# EAGLE board 7セグメントカウンタ回路20260909版 (EAGLE 9.7.0)
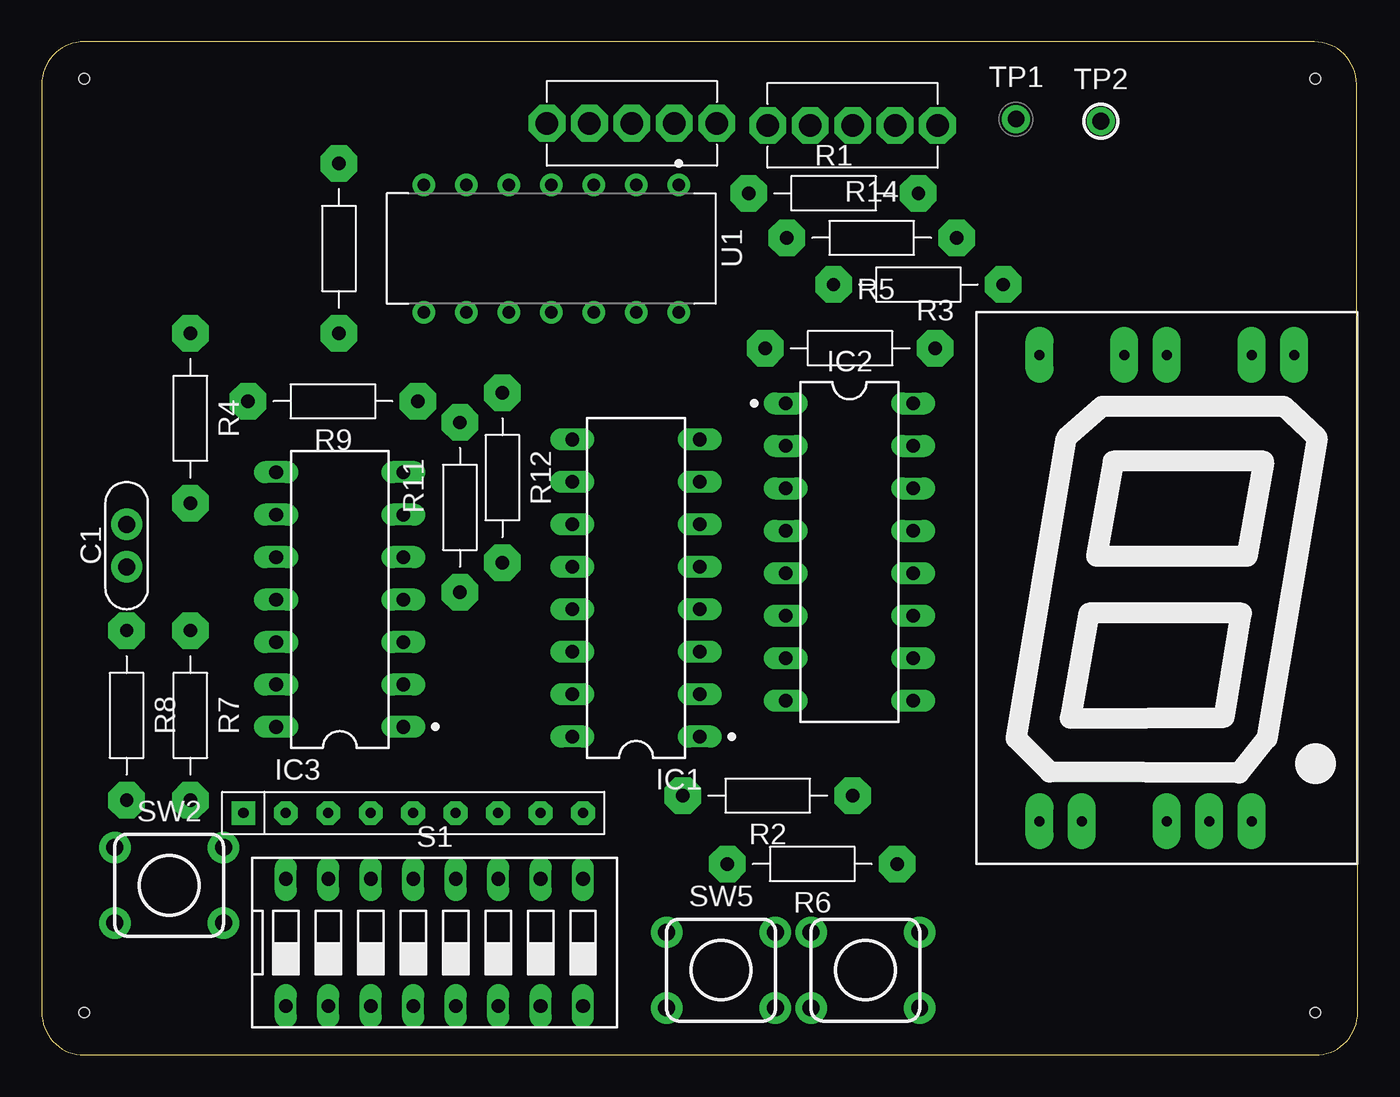
[diagram p0: board, top side]
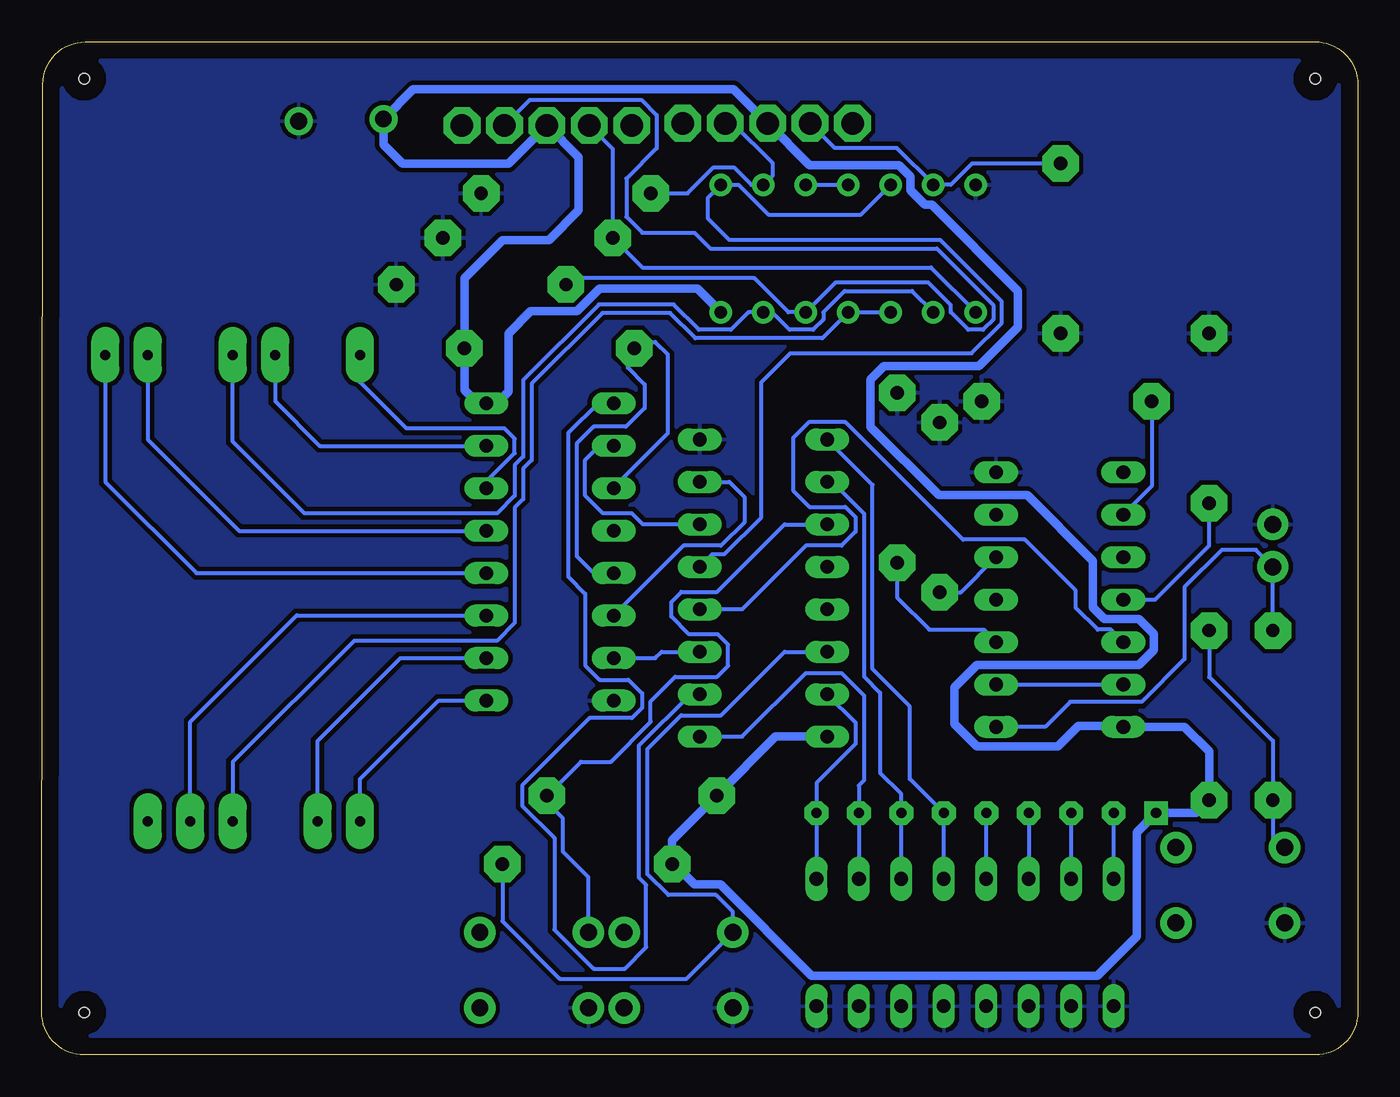
[diagram p1: board, bottom side, seen from below]

Size 78.74 x 60.63 mm. Coordinates in mm from the lower left corner, seen from the top.
Outline: 2.54,0 76.2,0 arc90 78.74,2.54 78.67,58.09 arc90 76.13,60.63 2.54,60.63 arc90 0,58.09 0,2.54 arc90 2.54,0
Copper layers (1*16): Top / Bottom
Stack-up Default Layer Stack: Top SilkScreen Epoxy Ink / Top SolderMask SR:Green 0.0254mm Dk 4.3 / Top Surface Finish Lead-Free 0.02mm / Top CuFoil:007 0.035mm / Dielectric-1 User Defined 1.5mm / Bottom CuFoil:007 0.035mm / Bottom Surface Finish Lead-Free 0.02mm / Bottom SolderMask SR:Green 0.0254mm Dk 4.3 / Bottom SilkScreen Epoxy Ink
Design rules: minimum copper width classes=1 20mil, minimum copper width 10mil, minimum drill size 0.6mm, copper clearance wire_polygon to wire_polygon 10mil, copper clearance wire_polygon to pad_smd 10mil, copper clearance wire_polygon to via 10mil, copper clearance pad_smd to pad_smd 10mil, copper clearance pad_smd to via 10mil, copper clearance via to via 10mil, copper clearance smd to pad (same net) 10mil, copper clearance smd to via (same net) 10mil, copper clearance smd to smd (same net) 10mil, dimension clearance 40mil, via restrict clearance 0mil, restrict clearance 0mil, drill distance 10mil, keepout clearance 0mil
Net classes: 1 power: width 0.508 mm
Holes 0.6 mm at 76.2,58.42 76.2,2.54 2.54,58.42 2.54,2.54

## Footprints (pad centres in the part's own frame; a part is rotated, then mirrored left to right if it is on the bottom)
CAP-THRU-2.54MM = drill 1.016 pad 1.88: 1 -1.27,0; 2 1.27,0
7SEG-NARG105 = drill 0.6 pad 1.676 long: 1 -7.62,-13.95; 2 -5.08,-13.95; 4 0,-13.95; 5 2.54,-13.95; 6 5.08,-13.95; 8 7.62,13.95; 9 5.08,13.95; 11 0,13.95; 12 -2.54,13.95; 14 -7.62,13.95
DIL16 = drill 0.813 long: 1 -3.81,8.89; 2 -3.81,6.35; 3 -3.81,3.81; 4 -3.81,1.27; 5 -3.81,-1.27; 6 -3.81,-3.81; 7 -3.81,-6.35; 8 -3.81,-8.89; 9 3.81,-8.89; 10 3.81,-6.35; 11 3.81,-3.81; 12 3.81,-1.27; 13 3.81,1.27; 14 3.81,3.81; 15 3.81,6.35; 16 3.81,8.89
DIL14 = drill 0.813 long: 1 -3.81,7.62; 2 -3.81,5.08; 3 -3.81,2.54; 4 -3.81,0; 5 -3.81,-2.54; 6 -3.81,-5.08; 7 -3.81,-7.62; 8 3.81,-7.62; 9 3.81,-5.08; 10 3.81,-2.54; 11 3.81,0; 12 3.81,2.54; 13 3.81,5.08; 14 3.81,7.62
AXIAL_PITCH400MIL = drill 0.8 pad 2.184 octagon: 1 -5.08,0; 2 5.08,0
RN8 = drill 0.6 pad 1.422 octagon: 1 0,-2.54; 2 0,-5.08; 3 0,-7.62; 4 0,-10.16; 5 0,-12.7; 6 0,-15.24; 7 0,-17.78; 8 0,-20.32 | drill 0.6 pad 1.422 square: COM 0,0
DS-08 = drill 0.813 long: 1 -8.89,-3.81; 2 -6.35,-3.81; 3 -3.81,-3.81; 4 -1.27,-3.81; 5 1.27,-3.81; 6 3.81,-3.81; 7 6.35,-3.81; 8 8.89,-3.81; 9 8.89,3.81; 10 6.35,3.81; 11 3.81,3.81; 12 1.27,3.81; 13 -1.27,3.81; 14 -3.81,3.81; 15 -6.35,3.81; 16 -8.89,3.81
TOGGLE_SWITCH = drill 1.34 pad 2.2 octagon: 1 -2.54,0; 2 0,0; 3 2.54,0; MTH1 -5.08,0; MTH2 5.08,0
SWITCH-MOMENTARY-PTH-6.5MM = drill 1.016 pad 1.88: 1 -3.251,2.261; 2 3.251,2.261; 3 -3.251,-2.261; 4 3.251,-2.261
TP-KEYSTONE-MINIATURE = drill 1 pad 1.676: TP 0,0
TP-KEYSTONE-COMPACT = drill 1 pad 1.676: TP 0,0
DIP762W53P254L1969H508Q14B = drill 0.743 pad 1.343: 1 -3.81,7.62; 2 -3.81,5.08; 3 -3.81,2.54; 4 -3.81,0; 5 -3.81,-2.54; 6 -3.81,-5.08; 7 -3.81,-7.62; 8 3.81,-7.62; 9 3.81,-5.08; 10 3.81,-2.54; 11 3.81,0; 12 3.81,2.54; 13 3.81,5.08; 14 3.81,7.62

## Placement (x,y rotation side)
C1  0.1u  [CAP-THRU-2.54MM]  5.08,30.48 90 top
DS1  7SEG-NARG105  [7SEG-NARG105]  67.31,27.94 0 top
IC1  74HC193TC74HC193AP(DIP)  [DIL16]  35.56,27.94 180 top
IC2  7447DIL16  [DIL16]  48.33,30.1 0 top
IC3  7414N  [DIL14]  17.83,27.25 180 top
R1  10K  [AXIAL_PITCH400MIL]  47.37,51.56 0 top
R2  10K  [AXIAL_PITCH400MIL]  43.43,15.52 180 top
R3  10k  [AXIAL_PITCH400MIL]  48.37,42.29 0 top
R4  10k  [AXIAL_PITCH400MIL]  8.89,38.1 270 top
R5  10K  [AXIAL_PITCH400MIL]  52.45,46.1 0 top
R6  10K  [AXIAL_PITCH400MIL]  46.1,11.43 180 top
R7  10K  [AXIAL_PITCH400MIL]  8.89,20.32 270 top
R8  10K  [AXIAL_PITCH400MIL]  5.08,20.32 270 top
R9  10k  [AXIAL_PITCH400MIL]  17.42,39.12 180 top
R10  10k  [AXIAL_PITCH400MIL]  17.78,48.26 90 top
R11  10k  [AXIAL_PITCH400MIL]  25.02,32.77 270 top
R12  10k  [AXIAL_PITCH400MIL]  27.56,34.54 270 top
R14  10k  [AXIAL_PITCH400MIL]  49.66,48.89 180 top
RN1  RN8RN8  [RN8]  12.07,14.48 90 top
S1  DS08  [DS-08]  23.5,6.73 0 top
SW1  TOGGLE_SWITCHES3P_TOGGLE_SWITCHES_DIP  [TOGGLE_SWITCH]  35.31,55.75 0 top
SW2  SWITCH_MOMENTARY  [SWITCH-MOMENTARY-PTH-6.5MM]  7.62,10.16 0 top
SW3  TOGGLE_SWITCHES3P_TOGGLE_SWITCHES_DIP  [TOGGLE_SWITCH]  48.51,55.63 0 top
SW4  SWITCH_MOMENTARY  [SWITCH-MOMENTARY-PTH-6.5MM]  49.28,5.08 0 top
SW5  SWITCH_MOMENTARY  [SWITCH-MOMENTARY-PTH-6.5MM]  40.64,5.08 0 top
TP1  TP_5000_MINIATURE  [TP-KEYSTONE-MINIATURE]  58.29,56.01 0 top
TP2  TP_5005_COMPACT  [TP-KEYSTONE-COMPACT]  63.37,55.88 0 top
U1  74HC02_PDIP  [DIP762W53P254L1969H508Q14B]  30.48,48.26 270 top

## Library data of the parts
C1 = Capacitor
DS1 = 7SEG-NARG105; CATEGORY: Opto-Electronic; SUB-CATEGORY: Display; TYPE: 7-Segment
IC1 = 74HC193
IC2 = 74series
IC3 = 74series; CATEGORY: Logic ICs; DESCRIPTION: Hex schmitt trigger Inverter 14-PDIP Through Hole; PACKAGE_SIZE: 14-PDIP; PACKAGE_TYPE: Through Hole; SUBCATEGORY: Gates and Inverters; TYPE: Inverter
R1-R12 R14 RN1 = resistor
S1 = DIP-SW; CATEGORY: Switches; DATASHEET: https://www.farnell.com/datasheets/2925626.pdf; DESCRIPTION: DIP Switch Slide Type 8Pos SPST-NO Raised Actuator Red TH; MANUFACTURER: Multicomp Pro; MPN: MCNDS-08V; OPERATING_TEMPERATURE: -40°C ~ 85°C; PACKAGE_SIZE: NA; PACKAGE_TYPE: Through Hole; PART_STATUS: Obsolete; ROHS: Compliant; SUBCATEGORY: DIP Switches; TYPE: SPST-NO
SW1 SW3 = Toggle_Switches
SW2 SW4 SW5 = Tact_switch
TP1 = TerminaiPoint; CATEGORY_L1: Test Points; CATEGORY_L2: PC Test Point; DATASHEET: https://www.keyelco.com/userAssets/file/K75p62.pdf; DESCRIPTION: Red PC Test Point, Miniature Phosphor Bronze Silver Plating Through Hole Mounting Type; MANUFACTURER: Keystone Electronics; MPN: 5000; PACKAGE: Through Hole; PART_STATUS: Active; ROHS: Compliant; SERIES: THM
TP2 = TerminaiPoint; CATEGORY_L1: Test Points; CATEGORY_L2: PC Test Point; DATASHEET: https://www.keyelco.com/userAssets/file/K75p62.pdf; DESCRIPTION: Red PC Test Point, Compact Phosphor Bronze Silver Plating Through Hole Mounting Type; MANUFACTURER: Keystone Electronics; MPN: 5005; PACKAGE: Through Hole; PART_STATUS: Active; ROHS: Compliant; SERIES: THM
U1 = IC_Logic; CATEGORY_L1: Logic ICs; CATEGORY_L2: Gates and Inverters; CATEGORY_L3: NOR Gate; DATASHEET: https://www.ti.com/lit/ds/symlink/cd74hc02.pdf; DESCRIPTION: Quadruple 2-Input NOR Gates 14-PDIP Through Hole; MANUFACTURER: Texas Instruments; MPN: CD74HC02E; OPERATING_TEMPERATURE: -55°C ~ 125°C; PACKAGE: Through Hole; PACKAGE_SIZE: 14-PDIP; PART_STATUS: Active; ROHS: Compliant; SERIES: 74HC

## Nets
193QA_TO_47INA: IC1.3 IC2.7
193QB_TO_47INB: IC1.2 IC2.1
193QC_TO_47INC: IC1.6 IC2.2
193QD_TO_47IND: IC1.7 IC2.6
+5.0V [power]: IC1.16 IC2.16 IC3.14 R2.2 R3.2 R6.2 R7.2 RN1.COM SW1.2 SW3.2 TP1.TP U1.14
COUNTER_STOP: R10.2 SW1.1 U1.6
GND [power]: C1.2 IC1.8 IC2.8 IC3.7 R1.2 R4.1 R5.2 R9.1 R10.1 R11.1 R12.1 R14.1 S1.1 S1.2 S1.3 S1.4 S1.5 S1.6 S1.7 S1.8 SW2.3 SW4.3 SW5.3 TP2.TP U1.7
IN_7SEG_4: DS1.11 U1.9 U1.13
IN_7SEG_11: DS1.4 U1.10 U1.11
IN_193_A: IC1.15 RN1.8 S1.9
IN_193_B: IC1.1 RN1.7 S1.10
IN_193_C: IC1.10 RN1.6 S1.11
IN_193_D: IC1.9 RN1.5 S1.12
IN_193_DOWN: IC1.4 IC3.12
IN_193_UP: IC1.5 U1.1 U1.5
N$1: IC3.3 R12.2
N$2: U1.3 U1.4
N$3: IC3.5 R11.2
N$4: IC3.2 IC3.13
N$5: IC3.9 R9.2
N$6: IC3.11 R4.2
N$9: RN1.4 S1.13
N$12: RN1.1 S1.16
N$14: RN1.3 S1.14
N$15: IC2.3 IC2.5 R3.1
N$21: RN1.2 S1.15
N$40: DS1.14 IC2.14
N$41: DS1.12 IC2.15
N$42: DS1.1 IC2.9
N$43: DS1.2 IC2.10
N$44: DS1.5 IC2.11
N$45: DS1.8 IC2.12
N$46: DS1.9 IC2.13
SIG_CLR: IC1.14 R6.1 SW5.1
SIG_DOWNCLK: C1.1 IC3.1 R8.1
SIG_DWCLK: R7.1 R8.2 SW2.1
SIG_GREEN: R5.1 SW3.3 U1.12
SIG_LOAD: IC1.11 R2.1 SW4.1
SIG_RED: R14.2 SW3.1 U1.8
SIG_UPCLK: R1.1 SW1.3 U1.2

## Tracks (layer width: path | path; a pad name or v marks a point on that pad's centre or on a via)
193QA_TO_47INA
  Bottom 0.254: IC2.7 42.04,23.75 41.66,24.13 IC1.3
193QB_TO_47INB
  Bottom 0.254: IC2.1 45.47,38.99 47.24,37.21 47.24,28.62 46.22,27.6 46.22,23.32 45.36,22.45 43.63,22.45 42.82,21.64 42.82,20.78 43.43,20.17 45.95,20.17 49.99,16.13 49.99,14.91 48.06,12.98 48.06,7.5 45.72,5.17 43.85,5.17 42.57,6.45 42.57,10.18 43,10.61 43,18.52 39.93,21.59 IC1.2
193QC_TO_47INC
  Bottom 0.254: IC2.2 45.38,36.45 46.22,35.61 46.22,33.48 45.15,32.41 43.43,32.41 42.77,31.75 IC1.6
193QD_TO_47IND
  Bottom 0.254: IC1.7 37.59,34.29 36.7,33.4 36.7,31.88 38.1,30.48 40.33,30.48 IC2.6
+5.0V
  Bottom 0.508: IC1.16 34.82,19.05 R2.2 41.02,12.85 R6.2 40.89,11.43 39.67,10.21 38.14,10.21 32.68,4.75 15.57,4.75 13.21,7.11 13.21,13.34 RN1.COM 9.65,14.48 R7.2 8.89,18.16 10.36,19.63 IC3.14 14.07,19.68 16.73,19.68 17.95,18.46 22.79,18.46 24.13,19.81 24.13,22 22.79,23.34 13.08,23.34 12.19,24.23 12.19,25.2 13.08,26.08 15.17,26.08 15.85,26.77 15.85,29.57 19.78,33.5 25.07,33.5 29.16,37.59 29.16,40.41 28.35,41.22 22.66,41.22 20.32,43.56 20.32,45.72 25.49,50.89 25.89,50.89 26.76,51.76 26.76,52.56 27.45,53.25 32.79,53.25 35.29,55.75 SW1.2 37.34,57.78 56.52,57.78 TP1.TP 58.29,54.48 57.15,53.34 50.8,53.34 SW3.2 46.61,53.72 46.61,50.55 48.39,48.77 51.18,48.77 53.45,46.5 R3.2 53.45,39.79 52.65,38.99 IC2.16 51.5,38.99 50.8,39.69 50.8,43.18 49.48,44.5 46.71,44.5 45.36,45.85 39.5,45.85 U1.14
COUNTER_STOP
  Bottom 0.254: SW1.1 31.29,54.27 27.58,54.27 25.4,52.1 U1.6 24.35,52.07 23.08,53.34 R10.2
GND
  pour Bottom: -1.27,62.23 80.01,62.23 80.01,-1.27 -1.27,-1.27
IN_7SEG_4
  Bottom 0.254: U1.9 26.67,45.72 30.7,45.72 31.97,44.45 31.97,44.01 32.58,43.4 34,43.4 35.05,44.45 U1.13 36.45,44.45 37.5,43.4 39.42,43.4 40.93,44.91 45.4,44.91 49.93,40.38 49.93,35.81 50.44,35.3 50.44,33.48 51.5,32.41 63.02,32.41 67.31,36.7 DS1.11
IN_7SEG_11
  Bottom 0.254: U1.10 U1.11 32.04,42.89 39.63,42.89 41.14,44.4 45.19,44.4 49.42,40.17 49.42,35.6 49.93,35.09 49.93,33.27 50.44,32.76 50.44,25.86 51.5,24.79 60.05,24.79 67.31,17.53 DS1.4
IN_193_A
  Bottom 0.254: S1.9 RN1.8 32.39,16.28 30.05,18.62 30.05,19.89 IC1.15
IN_193_B
  Bottom 0.254: S1.10 RN1.7 29.84,16.13 29.54,16.43 29.54,21.51 30.89,22.86 33.02,22.86 36.83,19.05 IC1.1
IN_193_C
  Bottom 0.254: S1.11 RN1.6 27.3,15.62 28.57,16.89 28.57,21.67 29.54,22.64 29.54,32.39 31.44,34.29 IC1.10
IN_193_D
  Bottom 0.254: S1.12 RN1.5 26.8,16.51 26.8,20.85 29.03,23.09 29.03,34.11 IC1.9
IN_193_DOWN
  Bottom 0.254: IC1.4 36.83,26.67 33.02,30.48 30.89,30.48 30.05,31.32 30.05,32.18 30.66,32.79 32.79,32.79 33.78,33.78 33.78,36.93 32.84,37.87 30.66,37.87 23.62,30.83 19.92,30.83 16.87,27.79 16.87,26.76 15.56,25.45 14.76,25.45 IC3.12
IN_193_UP
  Bottom 0.254: IC1.5 38.61,29.97 37.89,29.97 35.69,32.17 35.69,40.26 33.95,42 23.1,42 21.3,43.8 21.3,45.1 24.97,48.77 37.59,48.77 38.86,50.04 38.86,51.31 U1.1 37.05,52.07 35.27,50.29 29.72,50.29 U1.5
N$1
  Bottom 0.254: IC3.3 22.38,25.45 25.63,25.45 27.56,27.38 R12.2
N$2
  Bottom 0.254: U1.3 U1.4
N$3
  Bottom 0.254: R11.2 23.75,27.69 IC3.5
N$4
  Bottom 0.254: IC3.2 IC3.13
N$5
  Bottom 0.254: R9.2 12.32,39.09 12.32,34.03 IC3.9
N$6
  Bottom 0.254: R4.2 8.89,30.48 12.12,27.25 IC3.11
N$9
  Bottom 0.254: S1.13 RN1.4
N$12
  Bottom 0.254: S1.16 RN1.1
N$14
  Bottom 0.254: RN1.3 S1.14
N$15
  Bottom 0.254: IC2.3 44.52,33.97 41.28,37.21 41.28,41.91 42.04,42.67 42.91,42.67 R3.1 43.67,41.91 43.67,41.13 42.67,40.13 42.67,38.7 43.78,37.59 45.72,37.59 46.74,36.58 46.74,29.85 45.72,28.83 IC2.5
N$21
  Bottom 0.254: S1.15 RN1.2
N$40
  Bottom 0.254: DS1.14 59.69,40.26 56.92,37.49 51.05,37.49 50.44,36.88 50.44,36.02 52.14,34.32 IC2.14
N$41
  Bottom 0.254: DS1.12 64.77,39.12 62.1,36.45 IC2.15
N$42
  Bottom 0.254: DS1.1 59.69,16.51 54.99,21.21 IC2.9
N$43
  Bottom 0.254: DS1.2 62.23,18.8 57.28,23.75 IC2.10
N$44
  Bottom 0.254: DS1.5 69.85,19.94 63.48,26.31 52.17,26.31 IC2.11
N$45
  Bottom 0.254: DS1.8 74.93,34.29 69.47,28.83 IC2.12
N$46
  Bottom 0.254: DS1.9 72.39,36.83 66.93,31.37 IC2.13
SIG_CLR
  Bottom 0.254: R6.1 51.18,8 47.75,4.57 40.16,4.57 SW5.1 37.39,8.56 38.41,9.58 41.25,9.58 42.49,10.82 42.49,18.31 40.48,20.32 38.1,20.32 34.29,24.13 IC1.14
SIG_DOWNCLK
  Bottom 0.254: R8.1 C1.1 6.1,30.23 8.13,30.23 10.36,27.99 10.36,23.7 12.93,21.13 17.2,21.13 18.7,19.63 IC3.1
SIG_DWCLK
  Bottom 0.254: SW2.1 5.08,12.42 R8.2 5.08,18.8 8.89,22.61 R7.1
SIG_GREEN
  Bottom 0.254: SW3.3 49.53,57.15 42.86,57.15 41.95,56.24 41.95,54.25 43.76,52.44 43.76,50.17 42.8,49.2 39.67,49.2 38.73,48.26 25.18,48.26 21.81,44.89 21.81,44.01 22.42,43.4 23.3,43.4 24.35,44.45 24.35,44.89 25.69,46.23 31.24,46.23 U1.12 34.07,44.45 36.1,46.48 46.99,46.48 R5.1
SIG_LOAD
  Bottom 0.254: IC1.11 34.29,31.75 38.33,27.71 40.46,27.71 41.07,27.1 41.07,26.24 40,25.17 38.28,25.17 37.67,24.56 37.67,23.29 38.33,22.63 40.84,22.63 42.31,21.16 42.31,19.93 44.69,17.55 46.48,17.55 R2.1 48.51,15.12 47.55,14.16 47.55,12.17 46.03,10.64 SW4.1
SIG_RED
  Bottom 0.254: U1.8 25.53,47.12 42.8,47.12 R14.2 44.58,54.23 SW3.1
SIG_UPCLK
  Bottom 0.254: R1.1 40.1,51.56 38.54,53.12 37.33,53.12 36.28,52.07 U1.2 35.03,52.6 35.03,53.38 37.4,55.75 SW1.3